# EAGLE board Pinduino-Nano-WPC-adaptor-panalized.AR.wide (EAGLE 9.6.2)
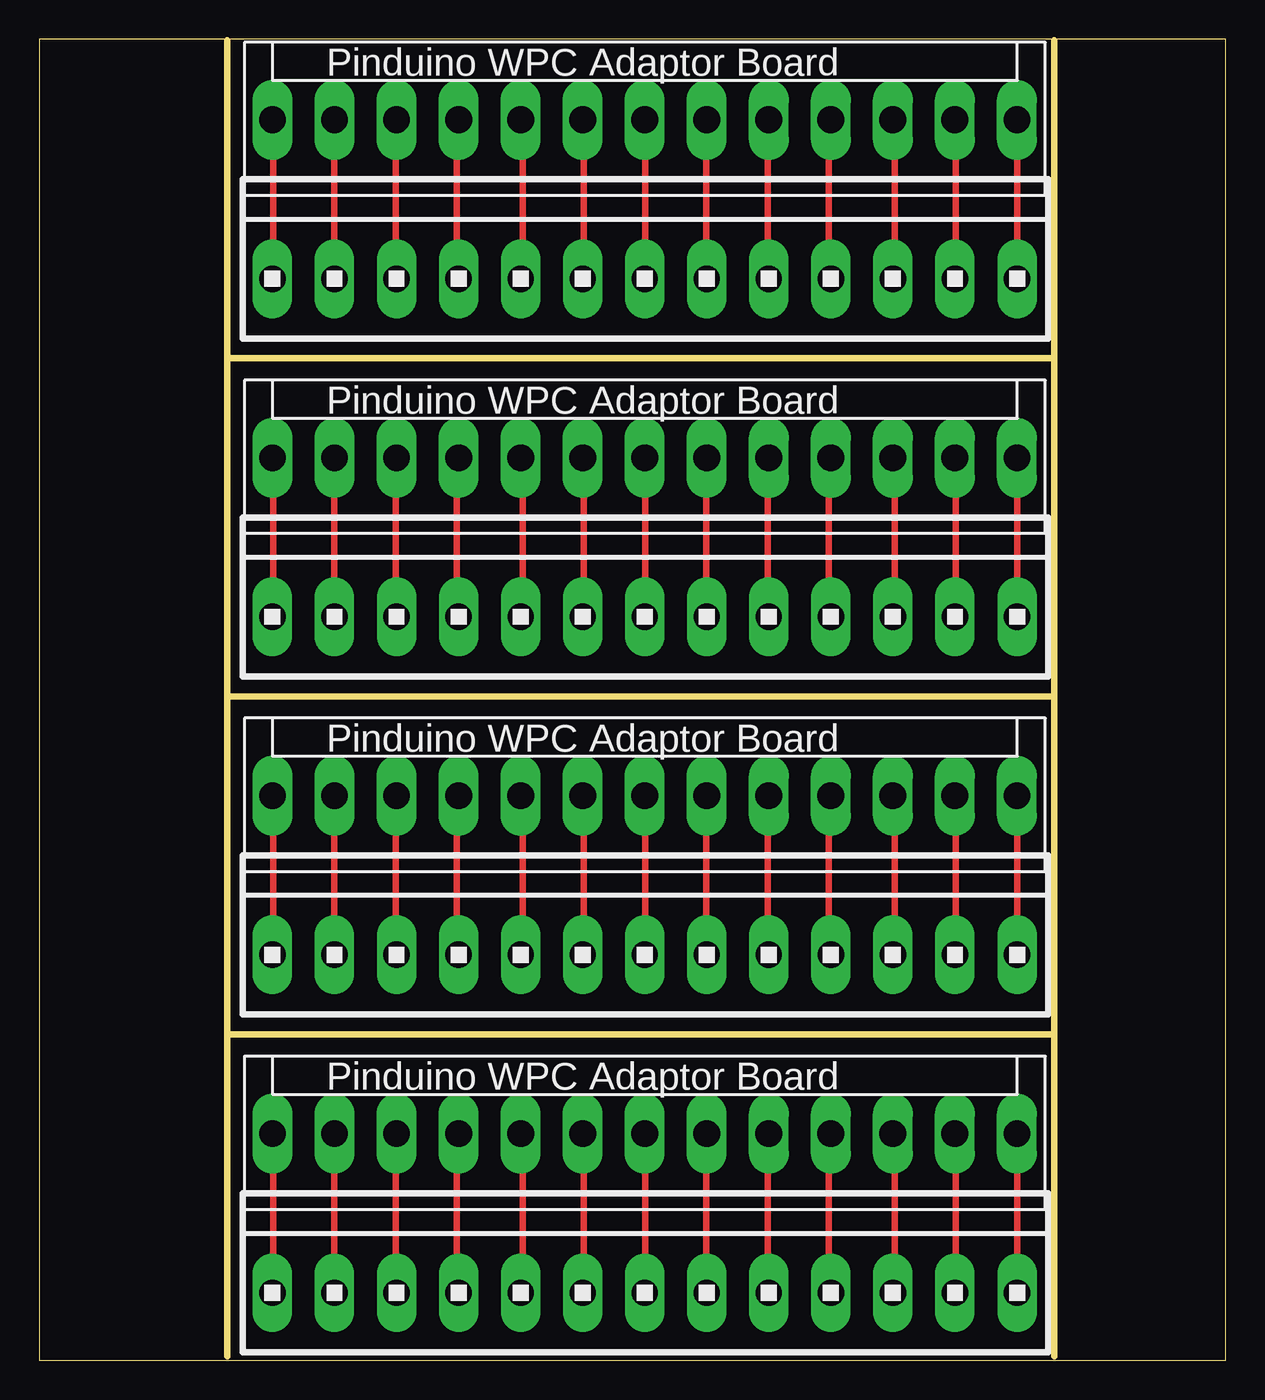
[diagram p0: board, top side]

Size 75.76 x 84.4 mm. Coordinates in mm from the lower left corner, seen from the top.
Outline: 0,0 75.76,0 75.76,84.4 0,84.4 0,0
Copper layers (1*16): Top 0.035mm / dielectric 1.5mm / Bottom 0.035mm
Design rules "SeeedStudio_2layer_DRU_no_angle_20140221": minimum track width 6mil, minimum drill 12mil, track to track 6mil, track to pad 6mil, pad to pad 6mil, via to via 6mil, smd to smd 0mil, copper to edge 10mil, drill to drill 10mil, minimum pad ring 10mil, minimum via ring 6mil, stop-mask expansion 2mil, vias tented up to drill 100mil, thermal gap 10mil
Net classes: 0 default: width 0.406 mm; 1 Power: width 0.61 mm; 2 GND: width 0.61 mm
Milling: 5 lines

## Footprints (pad centres in the part's own frame; a part is rotated, then mirrored left to right if it is on the bottom)
KK-156-13 = drill 1.7 pad 2.184 long: 1 -23.76,0; 2 -19.8,0; 3 -15.84,0; 4 -11.88,0; 5 -7.92,0; 6 -3.96,0; 7 0,0; 8 3.96,0; 9 7.92,0; 10 11.88,0; 11 15.84,0; 12 19.8,0; 13 23.76,0
1X13MTA = drill 1.676 long: 1 23.774,0; 2 19.812,0; 3 15.85,0; 4 11.887,0; 5 7.925,0; 6 3.962,0; 7 0,0; 8 -3.962,0; 9 -7.925,0; 10 -11.887,0; 11 -15.85,0; 12 -19.812,0; 13 -23.774,0

## Placement (x,y rotation side)
J126-J1  J126/J111  [KK-156-13]  38.67,36.07 0 top
J126-J2  J126/J111  [KK-156-13]  38.67,57.66 0 top
J126-J4  J126/J111  [KK-156-13]  38.67,79.25 0 top
J126-J111  J126/J111  [KK-156-13]  38.67,14.48 0 top
J126/J1  J126/J111  [1X13MTA]  38.67,25.91 0 top
J126/J2  J126/J111  [1X13MTA]  38.67,47.5 0 top
J126/J4  J126/J111  [1X13MTA]  38.67,69.09 0 top
J126/J111  J126/J111  [1X13MTA]  38.67,4.32 0 top

## Library data of the parts
J126-J1 J126-J2 J126-J4 J126-J111 = con-molex; OC_FARNELL: unknown; OC_NEWARK: unknown
J126/J1 J126/J2 J126/J4 J126/J111 = con-amp

## Nets
N$1: J126-J1.12 J126/J1.2
N$2: J126-J1.13 J126/J1.1
N$3: J126-J1.9 J126/J1.5
N$4: J126-J1.5 J126/J1.9
N$5: J126-J1.6 J126/J1.8
N$6: J126-J1.7 J126/J1.7
N$7: J126-J1.8 J126/J1.6
N$8: J126-J1.10 J126/J1.4
N$9: J126-J1.11 J126/J1.3
N$10: J126-J1.4 J126/J1.10
N$11: J126-J1.3 J126/J1.11
N$12: J126-J1.2 J126/J1.12
N$13: J126-J1.1 J126/J1.13
N$14: J126-J2.12 J126/J2.2
N$15: J126-J2.13 J126/J2.1
N$16: J126-J2.9 J126/J2.5
N$17: J126-J2.5 J126/J2.9
N$18: J126-J2.6 J126/J2.8
N$19: J126-J111.3 J126/J111.11
N$20: J126-J111.2 J126/J111.12
N$21: J126-J111.12 J126/J111.2
N$22: J126-J111.13 J126/J111.1
N$23: J126-J111.4 J126/J111.10
N$24: J126-J2.7 J126/J2.7
N$25: J126-J111.1 J126/J111.13
N$26: J126-J2.8 J126/J2.6
N$27: J126-J111.9 J126/J111.5
N$28: J126-J2.10 J126/J2.4
N$29: J126-J2.11 J126/J2.3
N$30: J126-J2.4 J126/J2.10
N$31: J126-J2.3 J126/J2.11
N$32: J126-J2.2 J126/J2.12
N$33: J126-J2.1 J126/J2.13
N$47: J126-J4.12 J126/J4.2
N$48: J126-J4.13 J126/J4.1
N$49: J126-J4.9 J126/J4.5
N$50: J126-J4.5 J126/J4.9
N$51: J126-J4.6 J126/J4.8
N$52: J126-J4.7 J126/J4.7
N$53: J126-J4.8 J126/J4.6
N$54: J126-J4.10 J126/J4.4
N$55: J126-J4.11 J126/J4.3
N$56: J126-J4.4 J126/J4.10
N$57: J126-J4.3 J126/J4.11
N$58: J126-J111.6 J126/J111.8
N$59: J126-J111.7 J126/J111.7
N$60: J126-J4.2 J126/J4.12
N$61: J126-J4.1 J126/J4.13
N$62: J126-J111.8 J126/J111.6
N$64: J126-J111.5 J126/J111.9
N$65: J126-J111.10 J126/J111.4
N$66: J126-J111.11 J126/J111.3

## Tracks (layer width: path | path; a pad name or v marks a point on that pad's centre or on a via)
N$1
  Top 0.406: J126/J1.2 58.53,25.93 58.53,35.99 J126-J1.12
N$2
  Top 0.406: J126/J1.1 62.44,35.99 J126-J1.13
N$3
  Top 0.406: J126/J1.5 46.52,25.93 46.52,35.99 J126-J1.9
N$4
  Top 0.406: J126/J1.9 30.87,25.93 30.87,35.99 J126-J1.5
N$5
  Top 0.406: J126/J1.8 34.78,25.93 34.78,36.07 J126-J1.6
N$6
  Top 0.406: J126/J1.7 38.7,25.93 38.7,35.99 J126-J1.7
N$7
  Top 0.406: J126/J1.6 42.61,25.93 42.61,35.99 J126-J1.8
N$8
  Top 0.406: J126/J1.4 50.43,25.93 50.43,35.99 J126-J1.10
N$9
  Top 0.406: J126/J1.3 54.62,25.93 54.62,35.99 J126-J1.11
N$10
  Top 0.406: J126/J1.10 26.68,25.93 26.68,35.99 J126-J1.4
N$11
  Top 0.406: J126/J1.11 22.77,25.93 22.77,35.99 J126-J1.3
N$12
  Top 0.406: J126/J1.12 18.86,35.99 J126-J1.2
N$13
  Top 0.406: J126/J1.13 14.95,25.93 14.95,35.99 J126-J1.1
N$14
  Top 0.406: J126/J2.2 58.53,47.73 58.53,57.51 J126-J2.12
N$15
  Top 0.406: J126/J2.1 62.44,57.51 J126-J2.13
N$16
  Top 0.406: J126/J2.5 46.52,47.73 46.52,57.51 J126-J2.9
N$17
  Top 0.406: J126/J2.9 30.87,47.73 30.87,57.51 J126-J2.5
N$18
  Top 0.406: J126/J2.8 34.78,47.73 34.78,57.51 J126-J2.6
N$19
  Top 0.406: J126/J111.11 22.77,4.42 22.77,14.48 J126-J111.3
N$20
  Top 0.406: J126/J111.12 18.86,14.48 J126-J111.2
N$21
  Top 0.406: J126/J111.2 58.53,4.42 58.53,14.48 J126-J111.12
N$22
  Top 0.406: J126/J111.1 62.44,14.48 J126-J111.13
N$23
  Top 0.406: J126/J111.10 26.68,4.42 26.68,14.48 J126-J111.4
N$24
  Top 0.406: J126/J2.7 38.7,47.73 38.7,57.51 J126-J2.7
N$25
  Top 0.406: J126/J111.13 14.95,4.42 14.95,14.48 J126-J111.1
N$26
  Top 0.406: J126/J2.6 42.61,47.73 42.61,57.51 J126-J2.8
N$27
  Top 0.406: J126/J111.5 46.52,4.42 46.52,14.48 J126-J111.9
N$28
  Top 0.406: J126/J2.4 50.43,47.73 50.43,57.51 J126-J2.10
N$29
  Top 0.406: J126/J2.3 54.62,47.73 54.62,57.51 J126-J2.11
N$30
  Top 0.406: J126/J2.10 26.68,47.73 26.68,57.51 J126-J2.4
N$31
  Top 0.406: J126/J2.11 22.77,47.73 22.77,57.51 J126-J2.3
N$32
  Top 0.406: J126/J2.12 18.86,57.51 J126-J2.2
N$33
  Top 0.406: J126/J2.13 14.95,47.73 14.95,57.51 J126-J2.1
N$47
  Top 0.406: J126/J4.2 58.53,69.24 58.53,79.02 J126-J4.12
N$48
  Top 0.406: J126/J4.1 62.44,79.02 J126-J4.13
N$49
  Top 0.406: J126/J4.5 46.52,69.24 46.52,79.02 J126-J4.9
N$50
  Top 0.406: J126/J4.9 30.87,69.24 30.87,79.02 J126-J4.5
N$51
  Top 0.406: J126/J4.8 34.78,69.24 34.78,79.02 J126-J4.6
N$52
  Top 0.406: J126/J4.7 38.7,69.24 38.7,79.02 J126-J4.7
N$53
  Top 0.406: J126/J4.6 42.61,69.24 42.61,79.02 J126-J4.8
N$54
  Top 0.406: J126/J4.4 50.43,69.24 50.43,79.02 J126-J4.10
N$55
  Top 0.406: J126/J4.3 54.62,69.24 54.62,79.02 J126-J4.11
N$56
  Top 0.406: J126/J4.10 26.68,69.24 26.68,79.02 J126-J4.4
N$57
  Top 0.406: J126/J4.11 22.77,69.24 22.77,79.02 J126-J4.3
N$58
  Top 0.406: J126/J111.8 34.78,4.42 34.78,14.48 J126-J111.6
N$59
  Top 0.406: J126/J111.7 38.7,4.42 38.7,14.48 J126-J111.7
N$60
  Top 0.406: J126/J4.12 18.86,79.02 J126-J4.2
N$61
  Top 0.406: J126/J4.13 14.95,69.24 14.95,79.02 J126-J4.1
N$62
  Top 0.406: J126/J111.6 42.61,4.42 42.61,14.48 J126-J111.8
N$64
  Top 0.406: J126/J111.9 30.87,4.42 30.87,14.48 J126-J111.5
N$65
  Top 0.406: J126/J111.4 50.43,4.42 50.43,14.48 J126-J111.10
N$66
  Top 0.406: J126/J111.3 54.62,4.42 54.62,14.48 J126-J111.11

## Text on the board
tNames: Pinduino WPC Adaptor Board | Pinduino WPC Adaptor Board | Pinduino WPC Adaptor Board | Pinduino WPC Adaptor Board